# Altium PCB AltPCB.PcbDoc
Units mil, origin at the board's own origin, x right, y up, seen from the top; angles counter-clockwise.
Board outline 2470 x 1130 mil, 2 copper layers (Top Layer, Bottom Layer); 7 components, 8 nets, 34 pads, 0 vias.
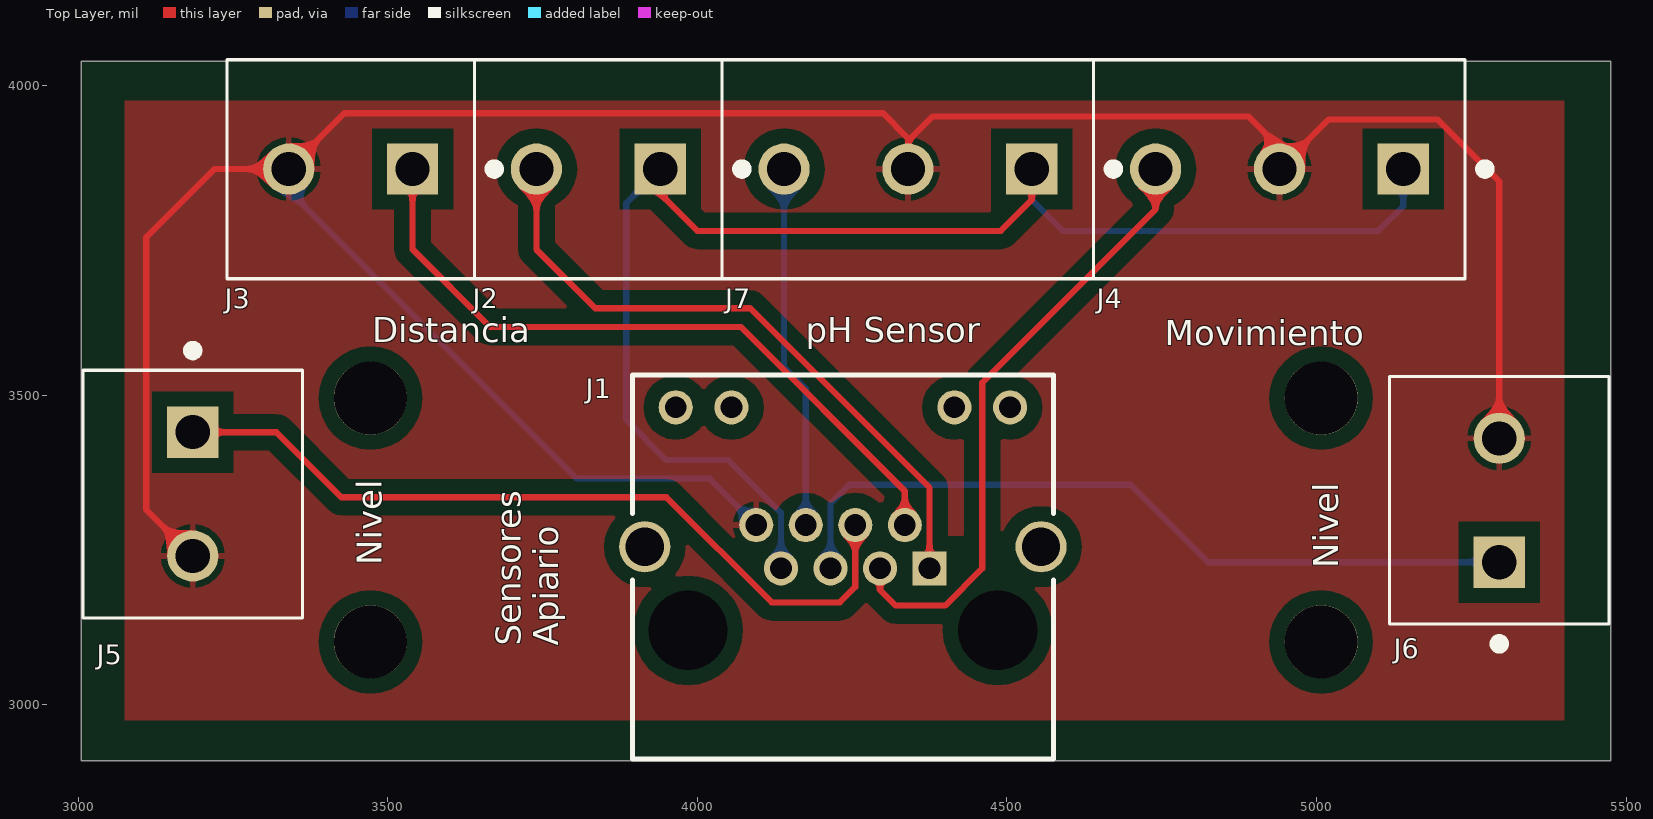
[diagram p0: Top Layer view]
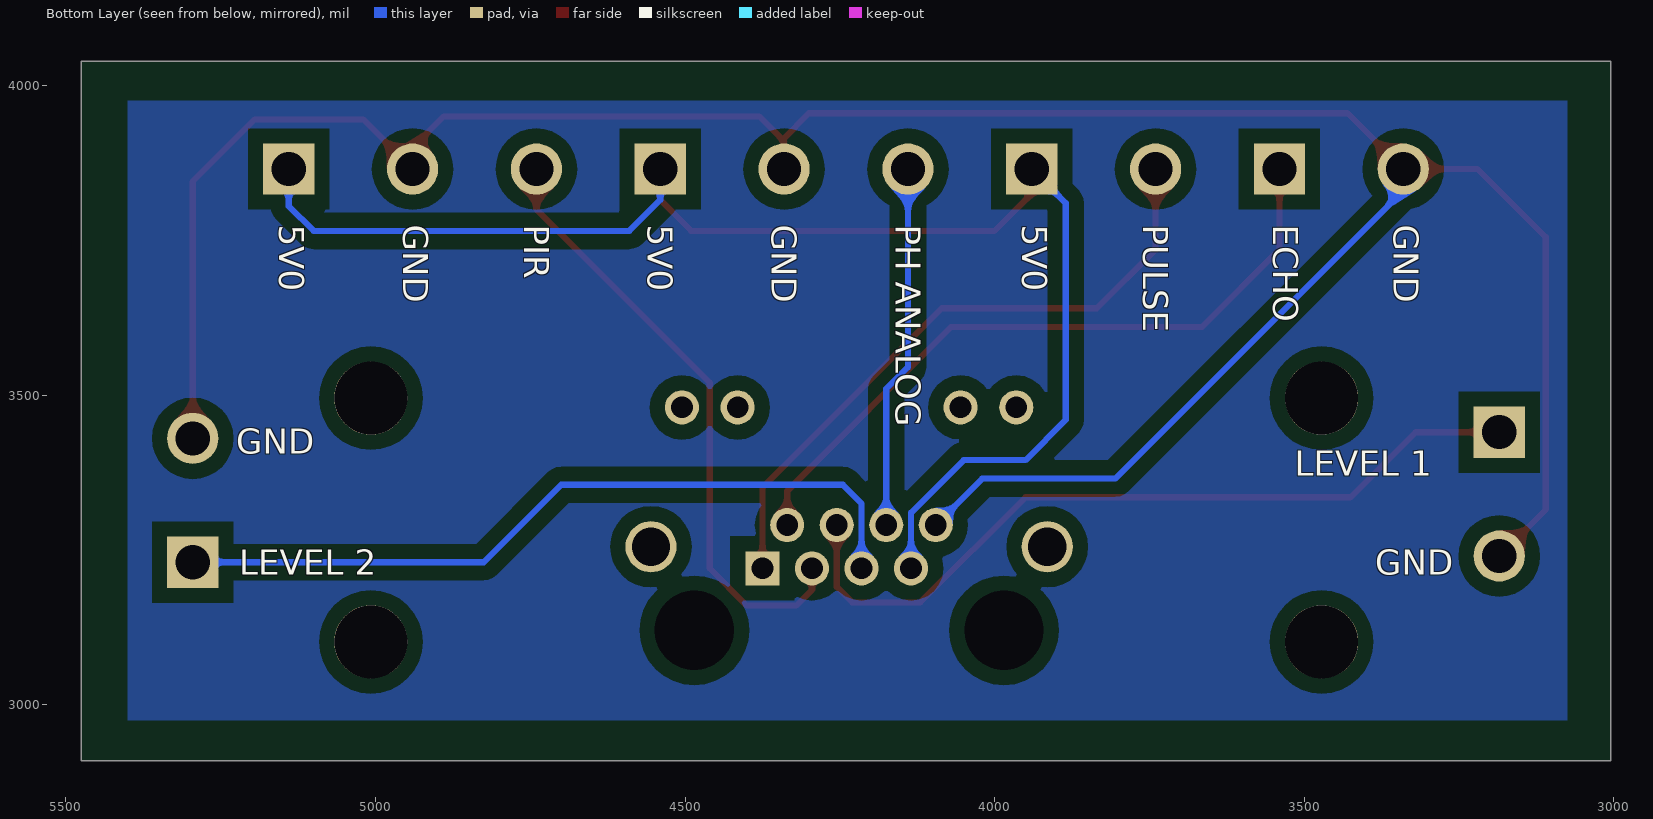
[diagram p1: Bottom Layer view, seen from below]
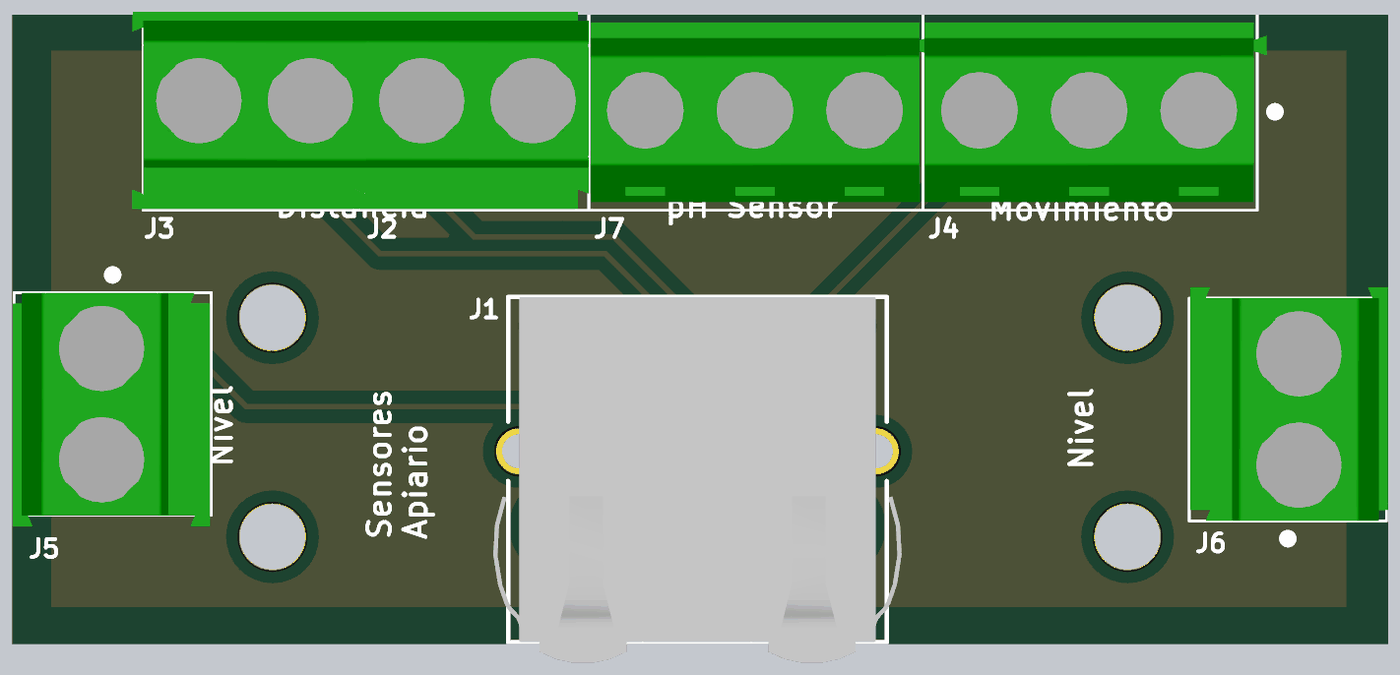
[diagram p2: 3D render of the assembled board from above, using the file's embedded part models]

## Layer stack, top to bottom
Top Solder: solder mask 0.4, Solder Resist, Dk 3.5
Top Layer: signal copper 1.4
Dielectric 1: dielectric 12.6, FR-4, Dk 4.8
Bottom Layer: signal copper 1.4
Bottom Solder: solder mask 0.4, Solder Resist, Dk 3.5

## Board outline
3005,2909.06 3005,4039.06 5475,4039.06 5475,2909.06

## Design rules (kind name [scope] priority, off if disabled: settings)
Clearance [All] p1: gap=6 except(24: Arc-Poly Track-Poly SMDPad-Poly THPad-Poly Via-Poly Fill-Poly Poly-Poly)
DiffPairsRouting [All] p1: maxlimit=10 minlimit=10 mostfreqgap=10 toplayer_minwidth=10 toplayer_maxwidth=15 toplayer_prefwidth=15 bottomlayer_minwidth=10 bottomlayer_maxwidth=15 bottomlayer_prefwidth=15 maxuncoupledlength=500
HoleSize [All] p1: absolutevalues=TRUE maxlimit=300 minlimit=1 maxpercent=80.000 minpercent=20.000
MinimumSolderMaskSliver [All] p1: minsoldermaskwidth=0
PlaneClearance [All] p1: clearance=32
PolygonConnect [All] p1: connectstyle=Relief reliefconductorwidth=10 reliefentries=4 polygonreliefangle="90 Angle" airgapwidth=10
RoomDefinition VALV2 [InComponentClass('VALV2')] p1: confinementstyle=ConfineIn formatcopy=TRUE lockcomponents=FALSE outline 9020,4674.45 9675,4674.45 9675,5955 9020,5955
RoomDefinition VALV1 [InComponentClass('VALV1')] p2: confinementstyle=ConfineIn formatcopy=TRUE lockcomponents=FALSE outline 9716.58,4674.45 10371.58,4674.45 10371.58,5955 9716.58,5955
RoomDefinition T1W2 [InComponentClass('T1W2')] p3: confinementstyle=ConfineIn formatcopy=TRUE lockcomponents=FALSE outline 10679.45,6500 10954.45,6500 10954.45,6790 10679.45,6790
RoomDefinition T1W1 [InComponentClass('T1W1')] p4: confinementstyle=ConfineIn formatcopy=TRUE lockcomponents=FALSE outline 10679.45,6800 10954.45,6800 10954.45,7090 10679.45,7090
RoomDefinition HS14 [InComponentClass('HS14')] p5: confinementstyle=ConfineIn formatcopy=TRUE lockcomponents=FALSE outline 10666.65,7098.5 10976.65,7098.5 10976.65,7388.5 10666.65,7388.5
RoomDefinition HS13 [InComponentClass('HS13')] p6: confinementstyle=ConfineIn formatcopy=TRUE lockcomponents=FALSE outline 10666.1,7385 10976.1,7385 10976.1,7675 10666.1,7675
RoomDefinition HS12 [InComponentClass('HS12')] p7: confinementstyle=ConfineIn formatcopy=TRUE lockcomponents=FALSE outline 10666.1,7675 10976.1,7675 10976.1,7965 10666.1,7965
RoomDefinition HS11 [InComponentClass('HS11')] p8: confinementstyle=ConfineIn formatcopy=TRUE lockcomponents=FALSE outline 10666.1,7965 10976.1,7965 10976.1,8255 10666.1,8255
RoutingTopology [All] p1: topology=Daisy_Simple
RoutingVias [All] p1: holewidth=28 width=50 viastyle="Through Hole" minholewidth=28 minwidth=50 maxholewidth=40 maxwidth=60
SilkToSilkClearance [All] p1: silktosilkclearance=0
SilkToSolderMaskClearance [IsPad] p1: minsilkscreentomaskgap=0 clearancetoexposedcopper=TRUE
SolderMaskExpansion SolderMaskExpansion_1 [IsVia] p1: expansion=0 soldermaskfromhole=TRUE
SolderMaskExpansion [All] p2: expansion=4
UnpouredPolygon [All] p0:
UnpouredPolygon UnpouredPolygon_1 [All] p2: allowunpoured=TRUE allowshelved=TRUE
Width [All] p1: maxlimit=40 minlimit=8 preferedwidth=16
22 further rules are at their usual default settings.

## Components (designator, comment, footprint, x,y, rotation, side; value= is the part's Value field where it differs from the comment)
J1 "2-406549-1" TECO-2-406549-1_V 4235,3255 r0 top
J2 "282841-2" TE_282841-2 3840,3865 r180 top
J3 "282841-2" TE_282841-2 3440,3865 r180 top
J4 "282841-3" TE_282841-3 4940,3865 r180 top
J5 "282841-2" TE_282841-2 3185,3340 r270 top
J6 "282841-2" TE_282841-2 5295,3330 r90 top
J7 "282841-3" TE_282841-3 4340,3865 r180 top

## Footprints (in the part's own frame and the unit in brackets; to place one, negate y for a bottom-side part, rotate by r counter-clockwise, add the part's x,y. Pads: shape width x height; smd on the part's side, far side on the other; paste and mask are expansions set on the pad)
TE_282841-2 [mm]
  rect 2.1x2.1 hole 1.4: 1(-2.54,0)
  round 2.1 hole 1.4: 2(2.54,0)
  silkscreen extent -6.09,-4.5 5.08,4.5, body extent -5.08,-4.55 5.58,4.45, height 15.21
TE_282841-3 [mm]
  rect 2.1x2.1 hole 1.4: 1(-5.08,0)
  round 2.1 hole 1.4: 2(0,0) 3(5.08,0)
  silkscreen extent -8.63,-4.5 7.62,4.5, body extent -8.05,-4.06 7.55,4.14, height 10.01
TECO-2-406549-1_V [mm] "Connector, 12-Leads, Body 17.27x15.75mm, Pitch 1.016mm"
  rect 1.4x1.4 hole 0.89: 1(3.556,-0.889)
  round 1.4 hole 0.89: 2(2.54,0.889) 3(1.524,-0.889) 4(0.508,0.889) 5(-0.508,-0.889) 6(-1.524,0.889) 7(-2.54,-0.889) 8(-3.556,0.889) 9(-4.572,5.715) 10(-6.858,5.715) 11(6.858,5.715) 12(4.572,5.715)
  round 0 hole 3.251 unplated: MH1(6.35,-3.429) MH2(-6.35,-3.429)
  round 2.1 hole 1.575: S1(8.128,0) S2(-8.128,0)
  silkscreen extent -8.63,-8.71 8.64,7.04, body extent -9.32,-9.68 9.32,7.04, height 14.61

## Part data
J1: library part CMP-2000-05541-1, "RJ45 Connector, Pitch 1.016 mm, 8 Position, Height 14.22 mm, Tail Length 3.18 mm, RoHS, Tray"
J2 J3 J5 J6: "Conn Terminal Block 2 POS 5.08mm Solder ST Thru-Hole 17.5A/Contact"
J4 J7: "Conn Terminal Block 3 POS 5.08mm Solder ST Thru-Hole 17.5A/Contact"

## Free pads (board coordinates)
  round 118.11 hole 118.11: ""(3471.89,3101.34) ""(3471.89,3495.04) ""(5007.32,3101.34) ""(5007.32,3495.04)

## Nets (pads, with @x,y where several pads share a name; then routed paths per layer and width w, separated by ;. In a path a pad name is that pad's centre, name@x,y a point inside that pad or via, vN(x,y) a via of type N, cw(c..) or ccw(c..) an arc to the next point about the centre after c; other vN are vias at no path point)
5V0: J1.7 J2.1 J4.1 J7.1 | length 2312.8
  Top Layer w10: J2.1 3940,3825 4000,3765 4490,3765 4540,3815 J7.1
  Bottom Layer w10: J2.1 3885,3810 3885,3460 3950,3395 4050,3395 4135,3310 J1.7 ; J7.1 4540,3815 4590,3765 5100,3765 5140,3805 J4.1
GND: J1.8 J3.2 J4.2 J5.2 J6.2 J7.2 | length 4456
  Top Layer w10: J5.2 3110,3315 3110,3755 3220,3865 J3.2 3430,3955 4300,3955 4340,3915 4340,3910 ; J7.2 4340,3910 ; J6.2 5295,3845 5195,3945 5020,3945 J4.2 4940,3900 4890,3950 4380,3950 4340,3910
  Bottom Layer w10: J3.2 3340,3830 3805,3365 4020,3365 J1.8
LV1_DIG: J1.4 J5.1 | length 1294.3
  Top Layer w10: J5.1 3320,3440 3425,3335 3950,3335 4120,3165 4230,3165 4255,3190 J1.4
LV2_DIG: J1.5 J6.1 | length 1249.2
  Bottom Layer w10: J1.5 4215,3325 4245,3355 4700,3355 4825,3230 J6.1
PH_ANALOG: J1.6 J7.3 | length 589.5
  Bottom Layer w10: J7.3 4140,3545 4175,3510 J1.6
PIR_DIG: J1.3 J4.3 | length 996.2
  Top Layer w10: J1.3 4295,3185 4320,3160 4400,3160 4460,3220 4460,3520 4740,3800 J4.3
S_ECHO: J1.2 J3.1 | length 1141.5
  Top Layer w10: J3.1 3540,3735 3665,3610 4070,3610 4335,3345 J1.2
S_PULSE: J1.1 J2.2 | length 1054.5
  Top Layer w10: J2.2 3740,3735 3835,3640 4085,3640 4375,3350 J1.1
pads on no net: J1.9 J1.10 J1.11 J1.12 J1.MH1 J1.MH2 J1.S1 J1.S2

## Polygon pours and split planes (outlines as drawn)
GND on Top Layer "GroundPlaneT" (solid, pour order 4): 3075,3975 3075,2975 5400,2975 5400,3975 3085,3975
no net on Bottom Layer "GroundPlaneT" (solid, pour order 6): 3075,3975 3075,2975 5400,2975 5400,3975 3085,3975

## Silkscreen, mask and mechanical layers (free items; w line width, h text height)
Top Overlay:
  text "Distancia" at 3475,3585 h40
  text "pH Sensor" at 4175,3585 h40
  text "Movimiento" at 4755,3580 h40
  text "Nivel" at 3490,3225 h40 r90
  text "Nivel" at 5035,3220 h40 r90
  text "Sensores / Apiario" at 3775,3095 h40 r90
Bottom Overlay:
  text "GND" at 3355,3775 h40 r90
  text "ECHO" at 3550,3775 h40 r90
  text "PULSE" at 3760,3775 h40 r90
  text "5V0" at 3955,3775 h40 r90
  text "PH ANALOG" at 4160,3775 h40 r90
  text "GND" at 4360,3775 h40 r90
  text "5V0" at 4560,3775 h40 r90
  text "PIR" at 4760,3775 h40 r90
  text "GND" at 4955,3775 h40 r90
  text "5V0" at 5155,3775 h40 r90
  text "GND" at 5225,3405 h40
  text "LEVEL 1" at 3515,3370 h40
  text "GND" at 3385,3210 h40
  text "LEVEL 2" at 5220,3210 h40
Mechanical 1:
  the board outline again, w6

## Dimensions
3005,4039.06 to 5475,4039.06 on Mechanical 13
5475,4039.06 to 5475,2909.06 on Mechanical 13
3471.89,3101.34 to 3005,2909.06 on Mechanical 13
3471.89,3101.34 to 5007.32,3101.34 on Mechanical 13
3471.89,3101.34 to 3005,2909.06 on Mechanical 13
3471.89,3101.34 to 3471.89,3495.04 on Mechanical 13